# Altium PCB QuarkNPi-Bata0.1-220730.pcbdoc (part 2 of 2)
Units mil, origin at the board's own origin, x right, y up, seen from the top; angles counter-clockwise.
Board outline 5064.99 x 3999.99 mil, 2 copper layers (Top Layer, Bottom Layer); 140 components, 100 nets, 508 pads, 483 vias.
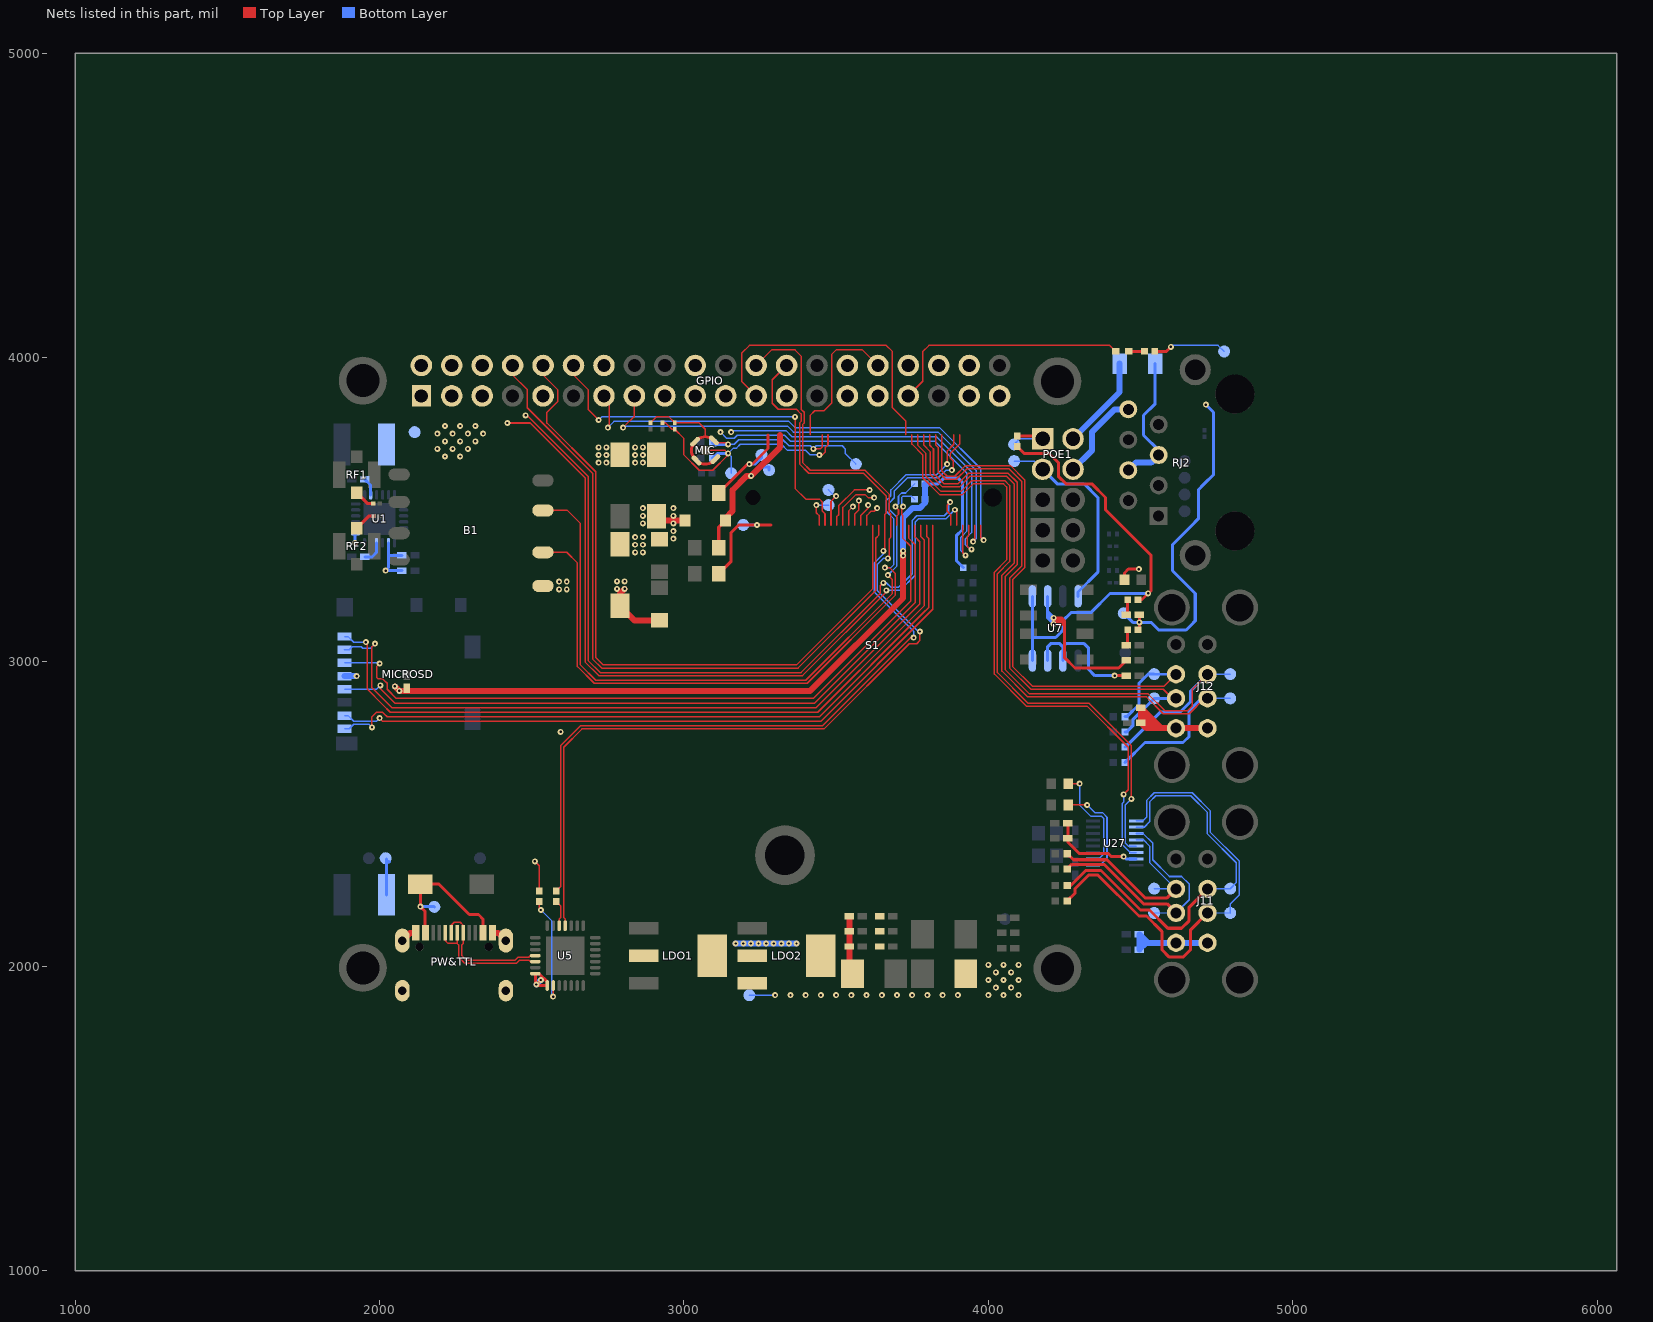
[diagram p2: the nets of this part, all layers, seen from the top]

## Via types
v1: diameter 19.69, hole 7.87, Top Layer to Bottom Layer, tented both sides, 483 vias

## Nets (pads, with @x,y where several pads share a name; then routed paths per layer and width w, separated by ;. In a path a pad name is that pad's centre, name@x,y a point inside that pad or via, vN(x,y) a via of type N, cw(c..) or ccw(c..) an arc to the next point about the centre after c; other vN are vias at no path point) (continued)
GPIO9: GPIO.21 S1.68 | length 1388
  Top Layer w5: S1.68@3916.26,3449.42 3916.27,3358.73 v1(3925,3350)
  Mid-Layer 2 w5: v1(3120,3755) 3120,3856.9 GPIO.21@3137.2,3874.1
  Bottom Layer w5: v1(3120,3755) 3140,3735 3165,3735 3175,3745 3330,3745 3350,3725 3825,3725 3930,3620 3930,3430 3910,3410 3910,3365 v1(3925,3350)
GPIO10/LCD_SDA: GPIO.19 S1.70 | length 1440.6
  Top Layer w5: 3935.95,3449.41 3935.95,3415.95 3930.7,3410.7 3930.7,3379.3 3940,3370 v1(3945,3370)
  Mid-Layer 2 w5: GPIO.19@3037.2,3874.1 3045.9,3874.1 3100,3820 3100,3745 3110,3735 3130,3735 3140,3745 3145,3745 v1(3155,3755)
  Bottom Layer w5: v1(3155,3755) 3160,3760 3335,3760 3355,3740 3830,3740 3945,3625 3945,3425 3925,3405 3925,3385 3940,3370 v1(3945,3370)
GPIO-CP_RX: GPIO.24 S1.44 U5.25 | length 3336
  Top Layer w5: U5.25@2610,2133.43 2610,2155 2605,2160 2605,2720 2665,2780 3460,2780 3740,3060 3765,3060 3775,3070 v1(3775,3100) ; GPIO.24@3237.2,3974.1 3288.1,4025 3365,4025 3385,4005 3385,3830 3395,3820 3395,3785 3390,3780 3390,3655 3415,3630 3595,3630 3675,3550 3675,3490 3680.06,3484.94 S1.44@3680.05,3449.42 3680.06,3410.06 3674.99,3405 3674.99,3344.99 v1(3670,3340)
  Bottom Layer w5: v1(3670,3340) 3654.99,3340 3634.99,3320 3634.99,3235 3654.99,3215 3769.99,3100 v1(3775,3100)
GPIO-CP_TX: GPIO.26 R6.2 S1.42 | length 3075.3
  Top Layer w5: R6.2@2580,2247.04 2595,2262.04 2595,2725 2660,2790 3455,2790 3745,3080 v1(3755,3080) ; GPIO.26@3337.2,3974.1 3290,3926.9 3290,3850 3310,3830 3370,3830 3385,3815 3385,3790 3380,3785 3380,3650 3410,3620 3590,3620 3665,3545 3665,3490 3660.37,3485.37 S1.42@3660.36,3449.42 ; v1(3655,3365) 3660.4,3370.4 S1.42@3660.36,3449.42
  Bottom Layer w5: v1(3655,3365) 3654.99,3355 3644.99,3345 3624.99,3325 3624.99,3300 3624.99,3230 3654.99,3200 3754.99,3100 v1(3755,3080)
GPIO-LCD_CS: GPIO.13 S1.74 | length 1703.6
  Top Layer w5: GPIO.13@2737.2,3874.1 2755,3856.3 2755,3775 v1(2750,3770) ; S1.74@3975.32,3449.42 3975.33,3409.67 v1(3985,3400)
  Bottom Layer w5: v1(2750,3770) 2770,3790 3345,3790 3365,3770 3840,3770 3975,3635 3975,3410 v1(3985,3400)
GPIO-LCD_RES: GPIO.38 S1.34 | length 888
  Top Layer w5: S1.34@3581.62,3449.42 3581.62,3481.62 3604.99,3505 v1(3605,3515)
  Mid-Layer 2 w5: v1(3605,3515) 3605,3540 3590,3555 3590,3575 3600,3585 3610,3585 3725,3700 3725,3815 3690,3850 3690,3894.99 3715,3919.99 3770,3919.99 3790,3939.99 3790,3994.99 3815,4019.99 3891.31,4019.99 GPIO.38@3937.2,3974.1
GPIO-LCD_RS: GPIO.36 S1.36 | length 893.4
  Top Layer w5: S1.36@3601.31,3449.42 3601.31,3481.31 3614.99,3495 3624.99,3495 v1(3635,3505)
  Mid-Layer 2 w5: v1(3635,3505) 3650,3520 3650,3570 3765,3685 3765,3790 3775,3800 3885,3800 3910,3825 3969.99,3825 3984.99,3840 3984.99,3900 3965,3919.99 3891.31,3919.99 GPIO.36@3837.2,3974.1
GPIO-LCD_SCL: GPIO.15 S1.72 | length 1637.5
  Top Layer w5: v1(2800,3770) 2837.2,3807.2 GPIO.15@2837.2,3874.1 ; v1(3950,3395) 3955.64,3400.64 S1.72@3955.63,3449.42
  Bottom Layer w5: v1(2800,3770) 2805,3775 3340,3775 3360,3755 3834.99,3755 3959.99,3630 3959.99,3404.99 v1(3950,3395)
GPIO_3V3: D7.1 GPIO.1 GPIO.17
  other v1: 2840,3360 2865,3360 2840,3385 2865,3385 2840,3410 2865,3410
GPIO_5V: D5.1 D6.2 GPIO.2 GPIO.4
  other v1: 2720,3654.99 2745,3654.99 2840,3654.99 2865,3655 2215,3675 2265,3675 2720,3679.99 2745,3679.99 2840,3679.99 2865,3680 2190,3700 2240,3700 2290,3700 2720,3704.99 2745,3704.99 2840,3704.99 2865,3705 2215,3725 2265,3725 2315.01,3725.01 2190,3750 2240,3750 2290.01,3750.01 2340.01,3750.01 2215,3775 2265.01,3775.01 2315.01,3775.01
GPIO_GND: F2.2 GPIO.6 GPIO.9 GPIO.14 GPIO.20 GPIO.25 GPIO.30 GPIO.34 GPIO.39 TP23.1
GPIOG11: GPIO.23 S1.49 | length 966.7
  Top Layer w5: GPIO.23@3237.2,3874.1 3190,3921.3 3190,4014.99 3215,4039.99 3664.99,4039.99 3684.99,4019.99 3684.99,3835 3729.26,3790.73 S1.49@3729.26,3745.67
I2C1_SCL: GPIO.5 S1.64 | length 2729.6
  Top Layer w5: v1(2480,3810) 2485,3810 2685,3610 2685,3005 2725,2965 3385,2965 3645,3225 3645,3250 v1(3655,3260) ; v1(3875,3525) 3864.99,3515 3864.99,3495 3876.89,3483.1 S1.64@3876.89,3449.42
  Mid-Layer 1 w5: GPIO.5@2337.2,3874.1 2401.3,3810 v1(2480,3810)
  Bottom Layer w5: v1(3655,3260) 3665,3260 3680,3245 3705,3245 3750,3290 3750,3465 3765,3480 3855,3480 3870,3495 3870,3520 v1(3875,3525)
I2C1_SDA: GPIO.3 S1.66 | length 2779.5
  Top Layer w5: v1(2420,3785) 2495,3785 2675,3605 2675,3000 2720,2955 3390,2955 3670,3235 v1(3665,3235) ; v1(3890,3500) 3896.58,3493.41 S1.66@3896.58,3449.42
  Mid-Layer 1 w5: GPIO.3@2237.2,3874.1 2296.3,3815 2375,3815 2395,3795 2410,3795 v1(2420,3785)
  Bottom Layer w5: v1(3665,3235) 3710,3235 3760,3285 3760,3460 3770,3470 3860,3470 v1(3890,3500)
KEYADC: GPIO.12 S1.22 | length 1285.3
  Top Layer w5: GPIO.12@2637.2,3974.1 2637.2,3942.8 2685,3895 2685,3830 v1(2720,3795) ; v1(3365,3805) 3365,3570 3400,3535 3445,3535 3455,3525 3455,3495 3463.51,3486.49 S1.22@3463.51,3449.42
  Bottom Layer w5: v1(2720,3795) 2730,3805 v1(3365,3805)
LED1_2: LED1.2 R17.2 | length 51.8
  Top Layer w10: LED1.2@4461.19,4019.99 R17.2@4512.95,4019.99
MICN: C13.2 C14.1 D17.2 MIC.2 S1.21 TP32.1 | length 1115.2
  Top Layer w5: C13.2@2890,3785.79 2909.2,3805 2950.8,3805 C14.1@2970,3785.79 3049.2,3785.8 3070.16,3764.83 3070.16,3740 ; MIC.2@3098.54,3728.24 3106.79,3720 v1@3145,3720 ; 3120.66,3720 3140,3720 v1(3145,3715) ; v1(3425,3700) 3447.97,3700 3453.68,3705.7 S1.21@3453.67,3745.67
  Top Layer w10: 3025,3695 ccw(c3065.49,3695) 3036.86,3666.37 MIC.2@3041.46,3661.76 ccw(c3069.87,3690.17) 3069.87,3650 ; 3025,3695.14 cw(c3065.16,3695.14) MIC.2@3036.76,3723.54 3041.35,3728.13 cw(c3070,3699.48) 3070,3740 ; 3070,3650 ccw(c3070,3690.5) 3098.64,3661.86 MIC.2@3103.24,3666.46 ; 3070.16,3740 cw(c3070.16,3699.86) MIC.2@3098.54,3728.24
  Bottom Layer w5: v1(3145,3715) 3165,3715 3180,3730 3325,3730 3345,3710 3415,3710 v1(3425,3700) 3435,3710 3520,3710 3530,3700 3530,3685 TP32.1@3565,3650
  Bottom Layer w10: D17.2@3094.68,3720 3099.68,3715 v1(3145,3715)
MICP: C11.1 C14.2 D16.1 MIC.1 S1.23 TP33.1 | length 951.9
  Top Layer w5: C11.1@2930,3785.79 2939.2,3785.8 2960.8,3764.2 C14.2@2970,3764.2 3000,3734.2 3000,3680 3050,3630 3095,3630 3145,3680 v1(3145,3685) 3134.99,3695 MIC.1@3070,3695 ; v1(3445,3680) 3454.8,3680 3465,3690.2 3465,3705 3473.36,3713.36 S1.23@3473.35,3745.67
  Bottom Layer w5: TP33.1@3155,3620 3155,3675 v1(3145,3685) 3162.8,3702.8 3172.8,3702.8 3185,3715 3320,3715 3340,3695 3400,3695 3415,3680 v1(3445,3680)
  Bottom Layer w10: D16.1@3094.69,3669.99 3109.68,3685 v1(3145,3685)
OUT_SND: C1.1 GPIO.32 R2.2 S1.17 TP26.1 | length 2978.1
  Top Layer w5: S1.17@3414.3,3745.67 3414.3,3809.3 3430,3825 3459.99,3825 3484.99,3850 3484.99,4009.99 3499.99,4024.99 3586.3,4024.99 GPIO.32@3637.2,3974.1
  Top Layer w10: R2.2@4492.03,3105 4496.45,3109.42 4496.45,3130.23 C1.1@4496.45,3155
  Mid-Layer 1 w10: GPIO.32@3637.2,3974.1 3698.1,4035 4550,4035 4580,4005 4625,4005 4655,4035 4720,4035 4760,3995 4760,3945 4715,3900 v1(4714.99,3845)
  Bottom Layer w10: TP26.1@4444.99,3160 4474.77,3130.23 v1(4496.45,3130.23) 4534.76,3130.23 4559.99,3105 4649.99,3105 4664.99,3120 4679.99,3135 4679.99,3185 4679.99,3225 4619.99,3285 4604.99,3300 4604.99,3355 4604.99,3385 4664.99,3445 4689.99,3470 4689.99,3535 4689.99,3565 4709.99,3585 4739.99,3615 4739.99,3720 4739.99,3820 v1(4714.99,3845)
POE1_2: POE1.2 R11.2 | length 310.5
  Bottom Layer w19.68: POE1.2@4278.47,3732.82 4431.8,3886.8 R11.2@4431.77,3979.99
POE1_4: POE1.4 RJ2.8 | length 298.7
  Bottom Layer w19.68: POE1.4@4278.47,3632.82 4340,3694.3 4340,3755 4415,3830 RJ2.8@4459.96,3830
R1_1: C1.2 R1.1 | length 51.8
  Top Layer w10: C1.2@4453.53,3155 4457.95,3159.42 R1.1@4457.95,3205
R2_1: C15.1 R2.1 | length 51.8
  Top Layer w10: C15.1@4453.53,3055 4457.95,3059.42 R2.1@4457.95,3105
RF1_1: CC1.2 RF1.1 | length 69.1
  Top Layer w10.24: RF1.1@1925,3555.95 1960.95,3520 CC1.2@1979.2,3520
RF2_1: CC2.2 RF2.1 | length 71.2
  Top Layer w10.24: RF2.1@1925,3439.06 1965.95,3480 CC2.2@1979.2,3480
RJ2_4: C22.2 R11.1 RJ2.4 RJ2.5 | length 884.4
  Top Layer w10: C22.2@4447.44,3270 4447.44,3292.44 4460,3305 v1(4495,3305)
  Mid-Layer 2 w10: RJ2.4@4459.96,3630 4509.99,3579.97 4509.99,3520 4509.99,3319.99 v1(4495,3305)
  Bottom Layer w10: R11.1@4548.21,3979.99 4548.21,3848.21 4509.99,3810 4509.99,3745 4559.96,3695.03 RJ2.5@4559.96,3680
  Bottom Layer w19.68: RJ2.4@4459.96,3630 4484.95,3655 4534.95,3655 RJ2.5@4559.96,3680
S1_1: C41.1 S1.1 S1.3 TP14.1 | length 325.2
  Top Layer w10: C41.1@3114.37,3555 3209.4,3650 v1(3215,3650) 3225,3650 3276.5,3701.5 S1.3@3276.5,3745.67
  Bottom Layer w10: v1(3215,3650) 3235,3650 3255,3670 TP14.1@3255,3680
S1_2: C42.1 S1.2 S1.4 TP13.1 | length 338.8
  Top Layer w10: C42.1@3114.37,3290 3155,3330.63 3155,3425 3180,3450 v1(3240,3450) 3266.08,3450 S1.2@3266.66,3449.42 ; S1.2@3266.66,3449.42 S1.4@3286.35,3449.42
  Bottom Layer w10: TP13.1@3195,3450 v1(3240,3450)
S1_5: C39.1 D8.1 S1.5 S1.7 TP15.1 | length 543.7
  Top Layer w10: C39.1@3114.37,3375 3114.36,3442.74 D8.1@3136.63,3465
  Top Layer w19.68: D8.1@3136.63,3465 3136.6,3473 3160,3496.4 3160,3565 3206.1,3611.1 v1(3221.14,3611.14) ; v1(3221.14,3611.14) 3315.87,3705.87 S1.7@3315.87,3745.67
  Bottom Layer w10: v1(3221.14,3611.14) 3250,3640 3280,3640 TP15.1@3280,3630
S$31: 
S$5784419856718101: 
S$5784419856718105: 
S$5784419856718109: 
S$5784419856718113: 
S$5784419856752916: 
S$5784419856752920: 
S$5784419856752927: 
S$5784419856752931: 
S$5784419856752939: 
S$5784419856752943: 
S$5784419856752959: 
SDMMC_CLK: MICROSD.5 S1.50 | length 2313.4
  Top Layer w5: v1(2002.83,2922.82) 2002.8,2912.2 2050,2865 3430,2865 3760,3195 3760,3385 3739.11,3405.89 S1.50@3739.1,3449.42
  Bottom Layer w5: MICROSD.5@1884.83,2910.26 1990.26,2910.26 v1@2005,2925
SDMMC_CMD: MICROSD.3 R3.2 S1.48 | length 2499.1
  Top Layer w5: v1(2000,2995) 1990,2985 1990,2975 1990,2950 1995,2945 2010,2945 2015,2940 2025,2930 2025,2910 2055,2880 3170,2880 3424.99,2880 3684.99,3140 3744.99,3200 3744.99,3380 3719.42,3405.57 S1.48@3719.41,3449.42 3719.42,3480.57 3714.99,3485 3714.99,3505 v1(3720,3510)
  Bottom Layer w5: MICROSD.3@1884.83,2996.88 1998.12,2996.88 v1(2000,2995) ; v1(3720,3510) 3720,3515 3715,3520 3715,3540 3720,3545 3748,3545 R3.2@3757.96,3535
SDMMC_D0: MICROSD.7 S1.58 | length 2378
  Top Layer w5: v1(2000,2815) 2010,2805 3449.99,2805 3817.84,3172.84 S1.58@3817.84,3449.42
  Bottom Layer w5: MICROSD.7@1884.83,2823.65 1896.35,2823.65 1915,2805 1990,2805 v1(2000,2815)
SDMMC_D1: MICROSD.8 S1.56 | length 2399.2
  Top Layer w5: v1(1975,2785) 1975,2820 1990,2835 1995,2835 2010,2835 2015,2830 2025,2820 3325,2820 3445,2820 3784.99,3160 3804.99,3180 3804.99,3405 3798.15,3411.84 3798.15,3449.41
  Bottom Layer w5: MICROSD.8@1884.83,2780.34 1900.34,2780.34 1915,2795 1965,2795 v1(1975,2785)
SDMMC_D2: MICROSD.1 S1.54 | length 2510.1
  Top Layer w5: v1(1955,3065) 1960,3060 1960,2975 1960,2910 2010,2860 2035,2835 3305,2835 3440,2835 3719.99,3115 3789.99,3185 3789.99,3400 3778.48,3411.51 S1.54@3778.47,3449.42
  Bottom Layer w5: MICROSD.1@1884.83,3083.49 1896.51,3083.49 1915,3065 v1(1955,3065)
SDMMC_D3: MICROSD.2 S1.52 | length 2495.6
  Top Layer w5: v1(1985,3060) 1975,3050 1975,2915 2040,2850 3435,2850 3775,3190 3775,3395 3758.79,3411.21 S1.52@3758.78,3449.42
  Bottom Layer w5: MICROSD.2@1884.83,3040.18 1900.2,3040.2 1910,3050 1940,3050 1945,3045 1970,3045 v1(1985,3060)
SDMMC_DET: R4.2 S1.46 | length 175.6
  Top Layer w5: v1(3695,3510) 3704.99,3500 3704.99,3485 3699.74,3479.74 S1.46@3699.73,3449.42
  Bottom Layer w5: v1(3695,3510) 3704.99,3520 3704.99,3545 3714.99,3555 3727.96,3555 R4.2@3757.96,3585
SPK-N: POE1.3 TP25.1 U7.8 | length 676
  Bottom Layer w5: TP25.1@4084.99,3660 4151.29,3660 POE1.3@4178.47,3632.82
  Bottom Layer w10: POE1.3@4178.47,3632.82 4226.3,3585 4315,3585 4360,3540 4360,3295 4295,3230 U7.8@4294.99,3215.61
SPK-P: POE1.1 R7.2 TP24.1 | length 188.1
  Top Layer w10: R7.2@4094.99,3742.04 4169.25,3742.04 POE1.1@4178.47,3732.82
  Bottom Layer w5: TP24.1@4084.99,3715 4102.82,3732.82 POE1.1@4178.47,3732.82
TP34_1: S1.24 TP34.1 | length 135.8
  Top Layer w5: S1.24@3483.2,3449.42 3483.21,3528.21 v1(3500,3545)
  Bottom Layer w5: TP34.1@3475,3565 3495,3545 v1(3500,3545)
TP35_1: S1.20 TP35.1 | length 109.3
  Top Layer w5: v1(3435,3515) 3435,3490 3443.84,3481.16 S1.20@3443.83,3449.42
  Bottom Layer w5: v1(3435,3515) TP35.1@3475,3515
U1_10: C9.2 U1.10 | length 76.2
  Bottom Layer w10: C9.2@1951.46,3345 1975.16,3345 1990.16,3360 U1.10@1990.16,3391.25
U1_20: C12.2 U1.20 | length 59.1
  Bottom Layer w10: C12.2@1951.46,3600 1970.47,3580.98 U1.20@1970.46,3548.74
U5_9: R9.2 U5.9 | length 368.4
  Top Layer w5: R9.2@2525,2212.96 2525,2190 v1(2530,2185) ; v1(2570,1900) 2570.6,1900.6 U5.9@2570.6,1936.58
  Bottom Layer w5: v1(2530,2185) 2565,2150 2565,1905 v1(2570,1900)
U5_26: R6.1 U5.26 | length 87.7
  Top Layer w5: R6.1@2580,2212.96 2595,2197.96 2595,2160 2590.3,2155.3 U5.26@2590.3,2133.43
U7_2: C16.2 U7.2 U7.3 | length 492.3
  Top Layer w10: v1(4415,2955) C16.2@4453.53,2955
  Bottom Layer w10: U7.3@4194.99,3004.39 4195,3050 4205,3060 4235,3060 4245,3050 ; v1(4415,2955) 4349.99,2955 4329.99,2975 4329.99,3045 4314.99,3060 4254.99,3060 4245,3050 ; 4245,3050 U7.2@4244.99,3004.39 4245,3050
U7_4: R1.2 R7.1 U7.4 U7.5 | length 1478.1
  Top Layer w10: R7.1@4094.99,3707.96 4118,3685 4200,3685 4230,3655 4230,3610 4255,3585 4340,3585 4385,3540 4385,3500 4535,3350 4535,3235 v1(4525,3225) 4505,3205 R1.2@4492.03,3205
  Bottom Layer w10: U7.4@4144.99,3004.39 U7.5@4144.99,3215.61 ; 4145,3080 4221.26,3080 4244.99,3103.73 4244.99,3135 4271.96,3161.96 4336.96,3161.96 4399.99,3225 v1(4525,3225)
U27_9: C20.1 U27.9 | length 334.4
  Top Layer w5: C20.1@4262.55,2530 v1(4325,2530)
  Bottom Layer w5: v1(4325,2530) 4350,2505 4375,2505 4390,2490 4390,2355 4367,2332 U27.9@4344.13,2331.97
U27_10: C19.1 U27.10 | length 364.1
  Top Layer w5: C19.1@4262.55,2600 v1(4300,2600)
  Bottom Layer w5: v1(4300,2600) 4300,2530 4337.7,2492.3 4372.7,2492.3 4380,2485 4380,2370 4362.8,2352.8 U27.10@4344.13,2352.83
UART1_RX: GPIO.10 S1.38 | length 2293.4
  Top Layer w5: GPIO.10@2537.2,3974.1 2537.2,3942.8 2585,3895 2585,3855 2550,3820 2550,3785 2710,3625 2710,3015 2735,2990 3370,2990 3620,3240 3620,3448.4 S1.38@3620.99,3449.42
UART1_TX: GPIO.8 S1.40 | length 2339.8
  Top Layer w5: GPIO.8@2437.2,3974.1 2437.2,3942.8 2485,3895 2485,3835 2700,3620 2700,3010 2730,2980 3375,2980 3630,3235 3630,3406.7 3640.7,3417.4 S1.40@3640.68,3449.42
UART3_CTS: GPIO.33 LED1.1 S1.26 | length 1369.4
  Top Layer w5: S1.26@3502.88,3449.42 3502.88,3477.88 3508.8,3483.8 3508.8,3513.8 3560,3565 v1(3610,3565) ; GPIO.33@3737.2,3874.1 3785,3921.9 3785,4020 3805,4040 4398.8,4040 LED1.1@4418.8,4019.99
  Mid-Layer 2 w5: v1(3610,3565) 3740,3695 3740,3871.3 GPIO.33@3737.2,3874.1
UART3_RTS: GPIO.29 S1.30 | length 464
  Top Layer w5: 3542.25,3449.41 3542.25,3497.25 v1(3555,3510)
  Mid-Layer 2 w5: GPIO.29@3537.2,3874.1 3537.2,3837.2 3505,3805 3505,3775 3530,3750 3530,3690 3540,3680 3540,3585 3555,3570 v1(3555,3510)
UART3_RX: GPIO.31 S1.32 | length 533.7
  Top Layer w5: S1.32@3561.94,3449.42 3561.94,3486.94 3574.99,3500 v1(3575,3530)
  Mid-Layer 2 w5: v1(3575,3530) 3565,3540 3565,3575 3552.3,3587.6 3552.3,3682.6 3540,3695 3540,3755 3515,3780 3515,3800 3535,3820 3583.1,3820 GPIO.31@3637.2,3874.1
UART3_TX: GPIO.37 S1.28 | length 712
  Top Layer w5: S1.28@3522.57,3449.42 3522.57,3507.57 3565,3550 3595,3550 3605,3540 v1(3625,3540)
  Mid-Layer 2 w5: v1(3625,3540) 3635,3550 3635,3575 3750,3690 3750,3800 3765,3815 3878.1,3815 GPIO.37@3937.2,3874.1
USB0-DM: B1.6 S1.65 | length 2389.5
  Top Layer w5: B1.6@2536.81,3360.04 2615,3360 2650,3325 2650,2985 2705,2930 3405,2930 3695,3220 3695,3290 3675,3310 v1(3660,3310) ; v1(3865,3650) 3865,3693.2 3886.75,3714.95 S1.65@3886.74,3745.67
  Bottom Layer w5: v1(3660,3310) 3680,3310 3690,3320 3690,3470 3665,3495 3665,3530 3680,3545 3680,3565 3730,3615 3830,3615 v1(3865,3650)
USB0-DP: B1.7 S1.67 | length 2493
  Top Layer w5: B1.7@2536.81,3497.83 2617.2,3497.8 2660,3455 2660,2990 2710,2940 3400,2940 3685,3225 3685,3270 v1(3670,3285) ; v1(3880,3630) 3884.1,3634.1 3884.1,3660.9 3875,3670 3875,3685 3906.43,3716.43 S1.67@3906.42,3745.67
  Bottom Layer w5: v1(3670,3285) 3700,3315 3700,3475 3675,3500 3675,3523.2 3691.3,3539.6 3691.3,3561.3 3735,3605 3835.8,3605 3860.8,3630 v1(3880,3630)
USB1-DM: D11.2 J12.2 S1.59 TP5.1 | length 1883.4
  Top Layer w5: S1.59@3827.68,3745.67 3827.69,3712.31 3835,3705 3835,3625 3860,3600 3895,3600 3930,3635 4068.2,3635 4110,3593.2 4110,3315 4070,3275 4070,2980 4140,2910 4575,2910 4604.4,2880.6 J12.2@4616.97,2880.63
  Bottom Layer w10: D11.2@4449.67,2770 4454.99,2770 4474.99,2790 4474.99,2809.98 TP5.1@4545,2880 J12.2@4616.97,2880.63
USB1-DP: D10.2 J12.3 S1.61 TP6.1 | length 1908
  Top Layer w5: S1.61@3847.37,3745.67 3847.38,3627.62 3865,3610 3890,3610 3925,3645 4072.9,3645 4120,3597.9 4120,3310 4080,3270 4080,2985 4145,2920 4577.6,2920 J12.3@4616.97,2959.37
  Bottom Layer w10: D10.2@4449.67,2820 4454.99,2820 4494.99,2860 4494.99,2930 4525,2960 TP6.1@4545,2960 J12.3@4616.97,2959.37
USB2-DM: D9.2 J12.6 S1.55 TP7.1 | length 2323.9
  Top Layer w5: S1.55@3788.31,3745.67 3788.32,3711.68 3810,3690 3810,3615 3850,3575 3905,3575 3940,3610 4059.7,3610 4085,3584.7 4085,3325 4045,3285 4045,2970 4130,2885 4520,2885 4575,2830 4660,2830 4710.6,2880.6 J12.6@4720.12,2880.63
  Bottom Layer w5: J12.6@4720.12,2880.63 TP7.1@4795,2880
  Bottom Layer w10: D9.2@4449.67,2670 4514.69,2735 4639.99,2735 4659.99,2755 4659.99,2840 4700.62,2880.63 J12.6@4720.12,2880.63
USB2-DP: D4.2 J12.7 S1.57 TP8.1 | length 2345.4
  Top Layer w5: S1.57@3808,3745.67 3808.01,3711.99 3820,3700 3820,3620 3855,3585 3900,3585 3935,3620 4065,3620 4095,3590 4095,3320 4055,3280 4055,2975 4135,2895 4525,2895 4580,2840 4655,2840 4670,2855 4670,2909.2 J12.7@4720.12,2959.37
  Bottom Layer w5: J12.7@4720.12,2959.37 TP8.1@4795,2960
  Bottom Layer w10: D4.2@4449.67,2720 4564.69,2835 4629.99,2835 4664.99,2870 4664.99,2904.24 J12.7@4720.12,2959.37
USB2.5-DM-HUB1: S1.51 U27.6 | length 2027.7
  Top Layer w5: S1.51@3748.94,3745.67 3748.95,3716.05 3785,3680 3785,3605 3840,3550 3915,3550 3950,3585 4050,3585 4060,3575 4060,3335 4020,3295 4020,2960 4125,2855 4324.5,2855 4460,2719.5 4460,2580 v1(4445,2565)
  Bottom Layer w5: v1(4445,2565) 4444.99,2540 4439.99,2535 4439.99,2400 4466.29,2373.7 U27.6@4485.86,2373.7
USB2.5-DP-HUB1: S1.53 U27.5 | length 2002.5
  Top Layer w5: S1.53@3768.63,3745.67 3768.63,3711.37 3795,3685 3795,3610 3845,3560 3910,3560 3945,3595 4055,3595 4070,3580 4070,3330 4030,3290 4030,2965 4130,2865 4330,2865 4470,2725 v1(4470,2550)
  Bottom Layer w5: v1(4470,2550) 4449.99,2530 4449.99,2405 4460.42,2394.57 U27.5@4485.86,2394.57
USB3-DM: D15.2 J11.2 TP12.1 U27.3 | length 889
  Top Layer w10: D15.2@4259.68,2319.99 4274.7,2335 4380,2335 4510,2205 4587.6,2205 J11.2@4616.97,2175.63
  Bottom Layer w5: U27.3@4485.86,2436.3 4508.69,2436.3 4539.99,2405 4539.99,2350 4594.99,2295 4634.99,2295 4659.99,2270 4659.99,2218.66 J11.2@4616.97,2175.63 ; TP12.1@4545,2175 J11.2@4616.97,2175.63
USB3-DP: D14.2 J11.3 TP11.1 U27.4 | length 730.8
  Top Layer w10: D14.2@4259.68,2369.99 4279.7,2350 4390,2350 4515,2225 4587.6,2225 J11.3@4616.97,2254.37
  Bottom Layer w5: U27.4@4485.86,2415.43 4509.56,2415.43 4529.99,2395 4529.99,2341.35 J11.3@4616.97,2254.37 ; TP11.1@4545,2255 J11.3@4616.97,2254.37
USB4-DM: D13.2 J11.6 TP9.1 U27.1 | length 1550.9
  Top Layer w10: D13.2@4259.68,2214.99 4285,2240 4285,2255 4330,2300 4360,2300 4495,2165 4520,2165 4570,2115 4570,2055 4595,2030 4640,2030 4665,2055 4665,2120.5 J11.6@4720.12,2175.63
  Bottom Layer w5: U27.1@4485.86,2478.03 4508.02,2478.03 4519.99,2490 4519.99,2545 4544.99,2570 4669.99,2570 4729.99,2510 4729.99,2440 4824.99,2345 4824.99,2235 4795.01,2205.01 TP9.1@4795,2175 J11.6@4720.12,2175.63
USB4-DP: D12.2 J11.7 TP10.1 U27.2 | length 1349.5
  Top Layer w10: D12.2@4259.68,2264.99 4270,2265 4320,2315 4370,2315 4500,2185 4530,2185 4590,2125 4635,2125 4660,2150 4660,2194.2 J11.7@4720.12,2254.37
  Bottom Layer w5: U27.2@4485.86,2457.16 4512.15,2457.16 4529.99,2475 4529.99,2540 4549.99,2560 4664.99,2560 4719.99,2505 4719.99,2435 4814.99,2340 4814.99,2274.98 TP10.1@4795,2255 J11.7@4720.12,2254.37
USB-CP-DM: PW&TTL.A7 PW&TTL.B7 U5.5 | length 416.9
  Top Layer w5: PW&TTL.B7@2215.46,2110.07 2215.47,2084.53 2224.8,2075.2 2254.8,2075.2 ; PW&TTL.A7@2254.83,2110.07 2254.84,2075.15 2260,2070 2260,2030 2280,2010 2450,2010 2460,2020 2490,2020 2494.69,2015.31 U5.5@2511.58,2015.31
USB-CP-DP: PW&TTL.A6 PW&TTL.B6 U5.4 | length 428.8
  Top Layer w5: PW&TTL.A6@2235.16,2110.08 2235.16,2135.16 2245,2145 2265,2145 2274.53,2135.47 PW&TTL.B6@2274.52,2110.07 ; PW&TTL.B6@2274.52,2110.07 2274.5,2074.51 2270,2070 2270,2035 2285,2020 2445,2020 2455,2030 2490,2030 2495,2035 U5.4@2511.58,2035.01
USBIN-GND: F1.2 PW&TTL.1 PW&TTL.2 PW&TTL.3 PW&TTL.4 PW&TTL.A1 PW&TTL.A12 PW&TTL.B1 PW&TTL.B12 TP3.1 | length 242.4
  Top Layer w10: PW&TTL.A1@2113.1,2110.07 PW&TTL.B12@2124.91,2110.07 ; PW&TTL.B1@2365.07,2110.07 PW&TTL.A12@2376.88,2110.07
  Top Layer w19.68: PW&TTL.1@2074.91,2084.47 2100.51,2110.08 PW&TTL.A1@2113.1,2110.07 ; PW&TTL.A12@2376.88,2110.07 2389.49,2110.08 PW&TTL.2@2415.07,2084.47
  Bottom Layer w10: F1.2@2022.97,2235 TP3.1@2022.97,2352.03 ; TP3.1@2030.01,2345 TP3.1@2032.97,2342.03
VDD_3V3: B1.5 C10.2 C23.2 C25.2 C30.2 C34.2 C40.1 C46.2 C47.1 D7.2 LDO2.2 LDO2.4 MICROSD.4 R3.1 R4.1 R8.1 R17.1 TP30.1 U1.8 U1.13 | length 8743.1
  Top Layer w10: v1(2065,2905) 2081.46,2905 C23.2@2090,2913.54 ; R17.1@4547.03,4019.99 4584.99,4019.99 v1(4599.99,4034.99)
  Top Layer w19.68: v1(2050,2920) v1(2065,2905) 3414.99,2905 3720,3210 v1(3720,3348.9) v1(3720,3365) ; v1(2805,3240) 2790,3225 D7.2@2790,3183.99 2837.16,3136.84 C47.1@2920,3136.84 ; C30.2@3543.54,2165 C46.2@3543.54,2115 C34.2@3543.54,2065 3543.53,1985.65 C40.1@3554.18,1975
  Mid-Layer 2 w10: v1(3720,3365) 3665,3420 3665,3560 3780,3675 3780,3770 3790,3780 3890,3780 3920,3810 4055,3810 4100,3855 4100,3995 4135,4030 4595,4030 v1(4599.99,4034.99)
  Mid-Layer 2 w19.68: v1(2590,3238.54) 2108.5,3238.5 2050,3180 2050,2225 2265,2010 2490,2010 2755,2275 3160,2275 3270,2165 v1(3270,2075) ; v1(2615,3238.54) 2616.46,3240 v1(2780,3240) ; v1(3170,2075) v1(3370,2075)
  Bottom Layer w5: v1(4599.99,4034.99) 4604.99,4039.99 4755,4039.99 TP30.1@4774.99,4019.99
  Bottom Layer w10: v1(1920,3390) 1920,3419.52 U1.13@1921.26,3420.78 ; 2029.53,3350 C25.2@2073.54,3350 ; U1.8@2029.52,3391.25 2029.53,3309.53 v1(2020,3300) C10.2@2073.54,3300 ; R4.1@3792.04,3585 3835,3585 3855,3605 3900,3605 3915,3590 3915,3435 3895,3415 3895,3332.95 R8.1@3917.96,3310
  Bottom Layer w19.68: MICROSD.4@1884.83,2953.57 v1(1924.83,2953.57) ; v1(3170,2075) v1(3370,2075) ; v1(3720,3348.9) v1(3720,3365) 3720,3475 3751.4,3506.4 3776.4,3506.4 3792,3522 R3.1@3792.04,3535 ; R3.1@3792.04,3535 R4.1@3792.04,3585
  other v1: 3195,2075 3220,2075 3245,2075 3295,2075 3320,2075 3345,2075 2590,3263.54 2615,3263.54 2780,3265 2805,3265
VDD_5V: C2.2 C3.2 C5.1 C8.2 C24.1 C27.1 C28.2 C33.2 C37.1 C43.1 C44.1 C45.1 D5.2 D8.2 J11.1 J11.5 J12.1 J12.5 LDO1.2 LDO1.4 LDO2.3 R9.1 TP31.1 U5.7 U5.8 U7.6 U27.7 | length 3483.3
  Top Layer w5: v1(2510,2345) 2525,2330 R9.1@2525,2247.04
  Top Layer w10: v1(2530,1955) v1(2515,1940) ; 4231.31,3125 4231.31,3128.68 v1(4215,3145) ; 4234.99,3145 4244.99,3135 4244.99,3125 ; 4250,3114.7 4250,3135 4240,3145 v1(4215,3145) ; C3.2@4261.46,2420 C2.2@4261.45,2470 ; C3.2@4261.46,2420 4261.5,2408.5 4300,2370 4395,2370 4405,2360 v1(4445,2360) ; C5.1@4453.53,3005 4428.53,2980 4284.99,2980 4249.99,3015 4249.99,3120 4244.99,3125 ; v1(2515,1940) 2518.42,1936.58 U5.8@2550.9,1936.58 2550.9,1949.1 2524.09,1975.91 U5.7@2511.58,1975.91 2511.58,1943.42 v1(2515,1940) ; v1(4215,3145) v1(4215,3125) 4244.99,3125 ; v1(4215,3145) 4224.99,3145 4244.99,3125
  Top Layer w19.68: D5.2@2910,3478.99 2924,3465 D8.2@3003.36,3465 ; 4539.7,2782.21 4501.45,2820.46 C43.1@4501.45,2850 ; 4554.14,2782.21 4501.45,2834.9 C43.1@4501.45,2850 ; J12.5@4720.12,2782.21 J12.1@4616.97,2782.21 4569.24,2782.21 ; C43.1@4501.45,2850 4569.24,2782.21 ; C43.1@4501.45,2850 4501.45,2800 4519.24,2782.21 4569.24,2782.21
  Mid-Layer 1 w5: v1(2510,2345) 2580,2345
  Mid-Layer 1 w19.68: v1(2515,1940) v1(2530,1955) 2580,2005 2580,2360 2580,2755 v1(2595,2770)
  Mid-Layer 2 w19.68: v1(2515,1940) v1(2530,1955)
  Bottom Layer w5: TP31.1@3215,1905 v1(3300,1905)
  Bottom Layer w10: 4202.26,3138.79 4202.26,3157.74 ; v1(4215,3125) 4195,3145 U7.6@4194.99,3215.61 4195,3164.99 v1(4215,3145) ; v1(4445,2360) 4452.17,2352.83 U27.7@4485.86,2352.83
  Bottom Layer w19.68: v1(2515,1940) v1(2530,1955) ; 4496.45,2077.21 4552.28,2077.21 ; J11.5@4720.12,2077.21 J11.1@4616.97,2077.21 ; J11.1@4616.97,2077.21 4518.66,2077.21 C44.1@4496.45,2055 C45.1@4496.45,2105 4524.24,2077.21 J11.1@4616.97,2077.21
  other v1: 3350,1905 3400,1905 3450,1905 3500,1905 3550,1905 3600,1905 3650,1905 3700,1905 3750,1905 3800,1905 3850,1905 3900,1905 4000,1905 4050,1905 4100,1905 4025,1930 4075,1930 4000,1955 4050,1955 4100,1955 4025,1980 4075,1980 4000,2005 4050,2005 4100,2005 2965,3405 2965,3430 2865,3455 2965,3455 2865,3480 2965,3480 2865,3505 2965,3505
VDD_USB_5V: D1.2 PW&TTL.A4 PW&TTL.A9 PW&TTL.B4 PW&TTL.B9 TP2.1 | length 539.6
  Top Layer w10: PW&TTL.B9@2156.41,2110.07 PW&TTL.A4@2144.6,2110.07 2150,2115.47 2150,2180 v1(2134,2196) D1.2@2134,2270 2195,2270 2295,2170 2325,2170 2340,2155 2340,2115.47 PW&TTL.A9@2345.39,2110.06 PW&TTL.B4@2333.57,2110.06
  Bottom Layer w10: v1(2134,2196) 2179,2196 TP2.1@2180,2195
pads on no net: B1.4 GPIO.7 GPIO.11 GPIO.22 GPIO.35 GPIO.40 PW1.2 PW&TTL. PW&TTL.A5 PW&TTL.A8 PW&TTL.B5 PW&TTL.B8 RESET1.2 RJ2. RJ2.7 S1.6 S1.19 S1.63 S1.MH1 S1.MH2 U1.2 U1.3 U1.4 U1.5 U1.6 U1.7 U1.12 U1.14 U1.15 U1.16 U1.17 U1.19 U1.21 U1.22 U5.1 U5.2 U5.6 U5.10 U5.11 U5.12 U5.13 U5.14 U5.15 U5.16 U5.17 U5.18 U5.19 U5.20 U5.21 U5.22 U5.23 U5.24 U5.27 U5.28 U27.13 U27.14 U27.15 U27.16

## Polygon pours and split planes (outlines as drawn)
GND on Bottom Layer (solid): 1995,3620 2020,3595 2020,3555 1805,3555 1805,4064.99 1995,4064.99
GPIO_GND on Bottom Layer (solid): 2010,3605 1995,3620 1995,4064.99 4229.99,4059.99 4229.99,3810 4004.99,3810 2205,3810 2160,3765 2160,3650 2115,3605 2010,3605
GND on Bottom Layer (solid): 1805,3605 2105,3605 2105,3285 2075,3255 1805,3255
GND on Bottom Layer (solid): 1995,2325 1805,2325 1805,1855 1945,1855 1945,2115 1995,2165
USBIN-GND on Bottom Layer (solid): 1995,2325 1995,2165 1945,2115 1945,1855 2470,1855 2470,2150 2320,2300 2320,2325
GPIO_5V on Bottom Layer (solid): 2160,3650 2160,3765 2205,3810 2885,3810 2885,3770 2885,3705 2885,3615 2390,3615 2355,3650
5V_IN on Bottom Layer (solid): 2390,3615 2390,3275 2330,3215 2330,3090 2495,3090 2550,3145 2550,3615
GND on Bottom Layer (solid): 4174.99,2250 4284.99,2250 4309.99,2275 4309.99,2505 4284.99,2530 4114.99,2530 4089.99,2505 4089.99,2275 4114.99,2250
AGND1 on Bottom Layer (solid): 4484.99,2885 4484.99,2940 4534.99,2990 4534.99,3030 4509.99,3055 4379.99,3055 4354.99,3080 4344.99,3090 4344.99,3280 4069.99,3280 3965,3175 3965,3145 4094.99,3015 4094.99,2885
AGND on Bottom Layer (solid): 2885,3615 3080,3615 3140,3775 2885,3775
VDD_5V on Bottom Layer (solid): 3265,1715 3265,1910 3295,1940 3900,1940 3925,1915 3925,1715
GND on Bottom Layer (solid): 1525,4364.99 5289.99,4364.99 5444.99,4209.99 5444.99,1725 5259.99,1540 1685,1540 1515,1710
GND on Mid-Layer 2 (solid): 1995,3595 1805,3595 1805,4064.99 1995,4064.99
VDD_3V3 on Mid-Layer 2 (solid): 1995,3595 2085,3510 2085,3175 2085,2335 1805,2335 1805,3595
VDD_3V3 on Mid-Layer 2 (solid): 1725,3172.5 2085,3172.5 2110,3197.5 2795,3197.5 2825,3227.5 2825,3302.5 2795,3302.5 2110,3302.5 2085,3327.5 1725,3327.5
GPIO_3V3 on Mid-Layer 2 (solid): 2990,4079.99 2990,3829.99 2965,3805 2460,3805 2400,3745 2400,3480 2445,3435 2885,3435 2885,3405 2885,3390 2885,3360 2825,3300 2795,3300 2110,3300 1995,3415 1995,4079.99
5V_IN on Mid-Layer 2 (solid): 2885,3435 2885,3805 2460,3805 2400,3745 2400,3480 2445,3435
5V_IN on Mid-Layer 2 (solid): 2085,2335 2270,2150 2450,2150 2505,2205 2505,2300 2425,2380 2425,3195 2110,3195 2085,3170 2085,2360
VDD_3V3 on Mid-Layer 2 (solid): 1805,2385 1805,1825 2470,1825 2470,2150 2270,2150 2035,2385
5V_IN on Mid-Layer 2 (solid): 2750,1760 2750,2030 2790,2070 3535,2070 3580,2025 3805,2025 3845,2065 3845,2350 3635,2560 3105,2560 2810,2560 2665,2560 2500,2560 2415,2475 2415,2790 2500,2710 3150,2705 3700,2705 3725,2680 3885,2520 3999.99,2405 3999.99,2200 3999.99,2055 3984.99,2040 3965,2020 3965,1760 2820,1760
VDD_3V3 on Mid-Layer 2 (solid): 2440,1645 2440,2205 2440,2350 2405,2385 2405,2620 3690,2620 3895,2415 3895,1645
VDD_5V on Mid-Layer 2 (solid): 1500,4384.99 1500,1905 1905,1500 4969.99,1500 5564.99,2095 5564.99,3979.99 5044.99,4499.99 1605,4499.99 1500,4394.99
GND on Mid-Layer 1 (solid): 1995,3595 1805,3595 1805,4064.99 1995,4064.99
AGND on Mid-Layer 1 (solid): 2885,3617.5 3464.99,3617.5 3464.99,4102.5 2885,4104.99
VDD_5V on Mid-Layer 1 (solid): 3265,1715 3265,1910 3295,1940 3900,1940 3925,1915 3925,1715
GND on Mid-Layer 1 (solid): 1525,4364.99 5289.99,4364.99 5444.99,4209.99 5444.99,1725 5259.99,1540 1685,1540 1515,1710
VDD_USB_5V on Top Layer (solid): 2135,2085 2135,2135 2075,2195 2075,2310 2090,2325 2260,2325 2260,2240 2355,2145 2355,2115 2355,2085
5V_IN on Top Layer (solid): 2915,1965 2915,2015 2820,2015 2820,2050 2815,2055 2805,2065 2750,2065 2750,2040 2750,1855 2915,1855
GND on Top Layer (solid): 1805,4064.99 2055,4064.99 2055,3725 2125,3655 2125,3305 2075,3255 1805,3255 1805,4019.99
VDD_3V3 on Top Layer (solid): 2635,3280 2490,3280 2490,3220 2635,3220
GND on Top Layer (solid): 3545,3665 3505,3665 3495,3675 3495,3770 3440,3825 3440,4074.99 3725,4074.99 3725,3745 3790,3680 3790,3615 3860,3545 3875,3545 3875,3460 3715,3460 3690,3485 3690,3540 3590,3640 3545,3640
GPIO_5V on Top Layer (solid): 2055,4089.99 2055,3725 2125,3655 2140,3655 2285,3655 2400,3770 2400,4089.99
GPIO_5V on Top Layer (solid): 2705,3725 2945,3725 2945,3635 2705,3635
5V_IN on Top Layer (solid): 2845,3440 2845,3575 2755,3575 2755,3440
GPIO_3V3 on Top Layer (solid): 2755,3425 2755,3340 2880,3340 2880,3425
VDD_5V on Top Layer (solid): 2845,3530 2845,3340 2920,3340 3005,3425 3030,3425 3030,3500 2985,3500 2955,3530
VDD_3V3 on Top Layer (solid): 2755,3245 2755,3265 2770,3280 2820,3280 2835,3265 2835,3190 2855,3170 2950,3170 2965,3155 2965,3120 2950,3105 2770,3105 2755,3120
VDD_5V on Top Layer (solid): 2915,1815 2915,2055 2955,2095 2965,2105 2985,2105 3140,2105 3140,1995 3170,1965 3300,1965 3350,1915 3825,1915 3835,1925 3835,2025 3965,2025 4124.99,2025 4124.99,1815
GND on Top Layer (solid): 1780,1745 1780,2325 2325,2325 2475,2175 3255,2175 3275,2155 3275,2105 2985,2105 2985,1715 1780,1715
5V_IN on Top Layer (solid): 3835,2025 4064.99,2025 4064.99,2190 4029.99,2225 3835,2225
VDD_5V on Top Layer (solid): 3685,1795 3685,2170 3665,2190 3600,2190 3585,2175 3585,1795
VDD_3V3 on Top Layer (solid): 3585,1760 3585,2180 3475,2180 3400,2105 3145,2105 3145,1760
GND on Top Layer (solid): 3670,1745 3670,2205 3695,2230 3830,2230 3835,2225 3835,1745
5V_IN on Top Layer (solid): 2260,2135 2260,2325 2280,2345 2465,2345 2500,2310 2500,2175 2460,2135
GND on Top Layer (solid): 1525,4364.99 5289.99,4364.99 5444.99,4209.99 5444.99,1725 5259.99,1540 1685,1540 1515,1710
GND on Top Layer (solid): 3185,2365 4054.99,2365 4054.99,3415 3185,3415

## Keep-outs
Keep-Out Layer:
  lines w10: 1807.2,1975.32 ccw(c1925.31,1975.32) 1925.31,1857.21 ; 1807.2,3943.82 cw(c1925.31,3943.82) 1925.31,4061.93 ; 5035.55,1857.21 ccw(c5035.55,1975.32) 5153.66,1975.32 ; 5035.55,4061.93 cw(c5035.55,3943.82) 5153.66,3943.82

## Other copper
Top Layer:
  region net VDD_5V: 2511.58,1975.91 2514.99,1972.49 2514.99,1940 2518.42,1936.58 2550.9,1936.58 2547.5,1939.97 2547.5,1952.5 2530,1970
  rectangle net S1_1: 3260,3715 3275,3775
  rectangle net S1_5: 3297.72,3710 3315,3776.35
  rectangle net S1_2: 3265,3420 3285,3480

## Silkscreen, mask and mechanical layers (free items; w line width, h text height)
Top Overlay:
  circle w8: c2087.2,3824.13 r7.69
  circle w8: c4128.46,3782.8 r7.69
  circle w8: c4128.46,3782.8 r7.69
  circle w8: c4128.46,3483.19 r7.69
  circle w8: c4128.46,3383.19 r7.69
  circle w19.68: c1945,1995 r98.43
  circle w19.68: c1945,1995 r80.16
  circle w19.68: c4227.2,1992.8 r80.16
  circle w19.68: c4227.2,1992.8 r98.43
  circle w19.68: c4227.2,3921.93 r80.16
  circle w19.68: c4227.2,3921.93 r98.43
  circle w19.68: c1945,3924.13 r80.16
  circle w19.68: c1945,3924.13 r98.43
  lines w3.94 net S$5784419856752916: 3490,2149.2 3500,2139.2 3500,2120 3510,2110 3510,2105.7
  lines w3.94 net S$5784419856752920: 3490,2130 3490,2170
  lines w3.94 net S$5784419856752939: 3720,2106.9 3730,2116.9 3730,2155 3745,2170 3765,2170 3775,2180
  lines w3.94 net S$5784419856752943: 3509.99,2044.99 3509.99,2134.99 ; 3720,2045 3720,2135
  lines w3.94 net S$5784419856752959: 3740,2180 3825,2180
  lines w10 net S$31: 4225.9,3782.8 4228.1,3780.6 4228.1,3582.8
  lines w10.24 net S$5784419856718101: 4128.47,3283.22 4128.47,3782.82
  lines w10.24 net S$5784419856718105: 4128.47,3283.22 4328.47,3283.22
  lines w10.24 net S$5784419856718109: 4328.47,3283.22 4328.47,3782.82
  lines w10.24 net S$5784419856718113: 4128.47,3782.82 4328.47,3782.82
  text "ETHERNET" at 4861.7,3985.59 h30
  text "PoE" at 4281.27,3788.07 h19.68
  text "SP-+" at 4128.78,3560 h27.56 r90
  text "JLCJLCJLCJLC" at 3354.99,3553.34 h43.31
  text "GND" at 4128.78,3475 h27.56 r90
  text "PWR" at 4128.78,3385 h27.56 r90
  text "RES" at 4128.78,3295 h27.56 r90
  text "RES" at 4108.78,3160 h27.56 r90
  text "PWR" at 4108.77,3015 h27.56 r90
  text "GitHub@TitanRGB" at 2294.99,2989.41 h51.18
  text "OSHWHub@RGB_YES" at 2294.99,2869.41 h51.18
  text "GitHub@PiCenter" at 2294.99,2749.41 h51.18
  text "QuarkNPi Bata0.1-220730" at 2299.99,2643.35 h43.31
  text "PWR IN" at 2145,2127.5 h45
Bottom Overlay:
  circle w19.68: c1945,1995 r80.16
  circle w19.68: c1945,1995 r98.43
  circle w19.68: c4227.2,1992.8 r98.43
  circle w19.68: c4227.2,1992.8 r80.16
  circle w19.68: c4227.2,3921.93 r98.43
  circle w19.68: c4227.2,3921.93 r80.16
  circle w19.68: c1945,3924.13 r98.43
  circle w19.68: c1945,3924.13 r80.16
Top Solder:
  lines w14: 3025,3695 ccw(c3065.49,3695) 3036.86,3666.37 ; 3025,3695.14 cw(c3065.16,3695.14) 3036.76,3723.54 ; 3041.35,3728.13 cw(c3070,3699.48) 3070,3740 ; 3041.46,3661.76 ccw(c3069.87,3690.17) 3069.87,3650 ; 3070,3650 ccw(c3070,3690.5) 3098.64,3661.86 ; 3070.16,3740 cw(c3070.16,3699.86) 3098.54,3728.24